# EAGLE board xbee adapter (EAGLE 6.2)
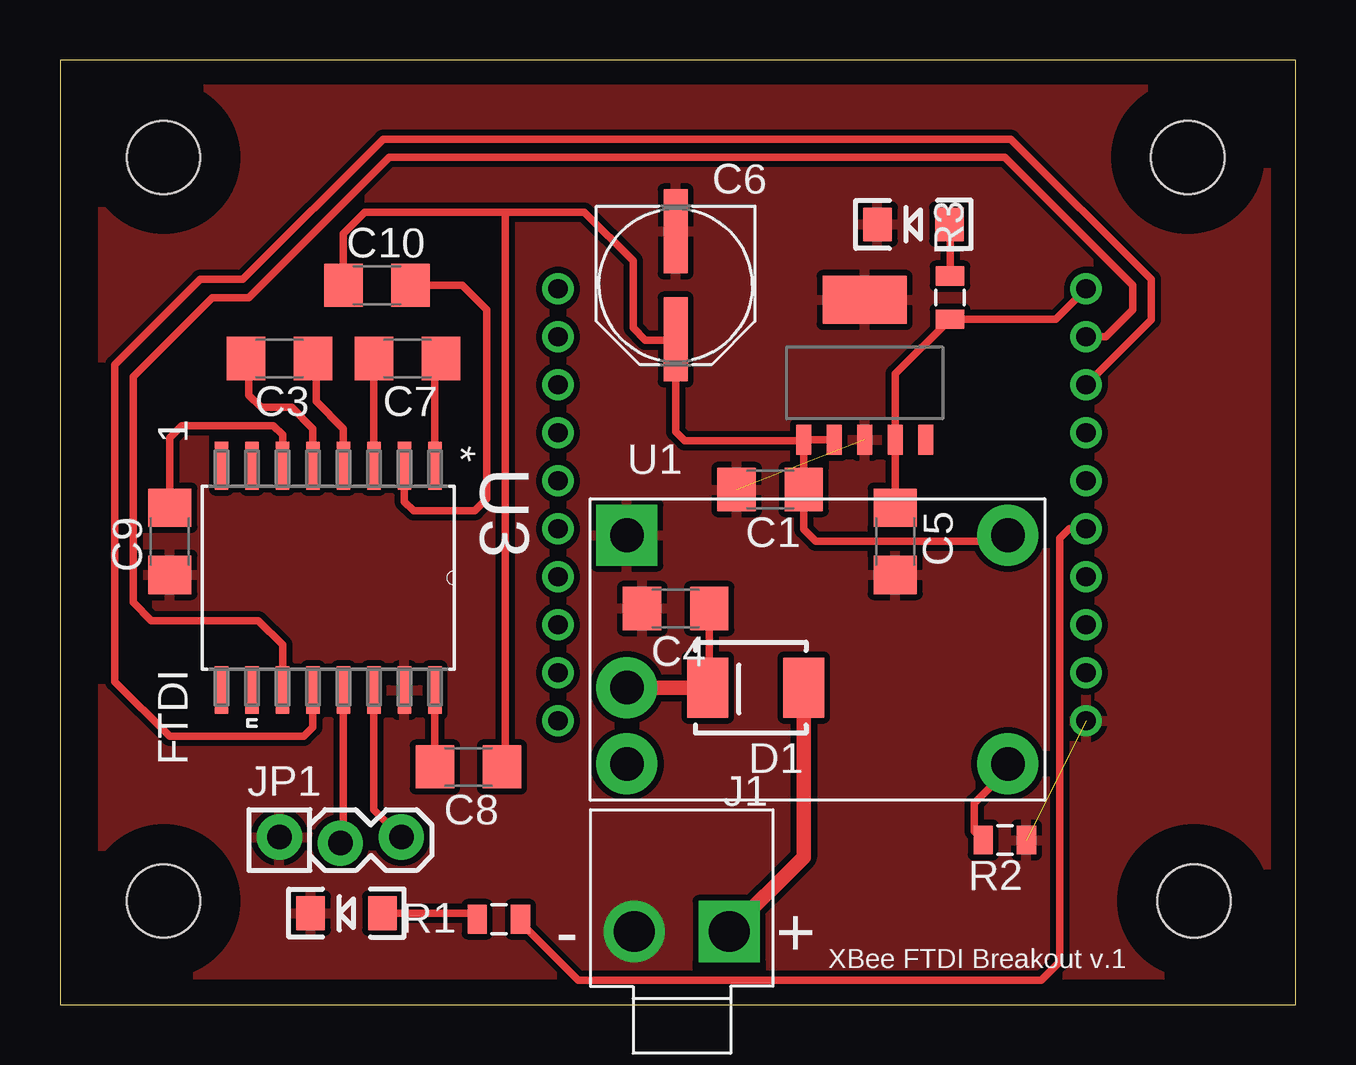
[diagram p0: board, top side]
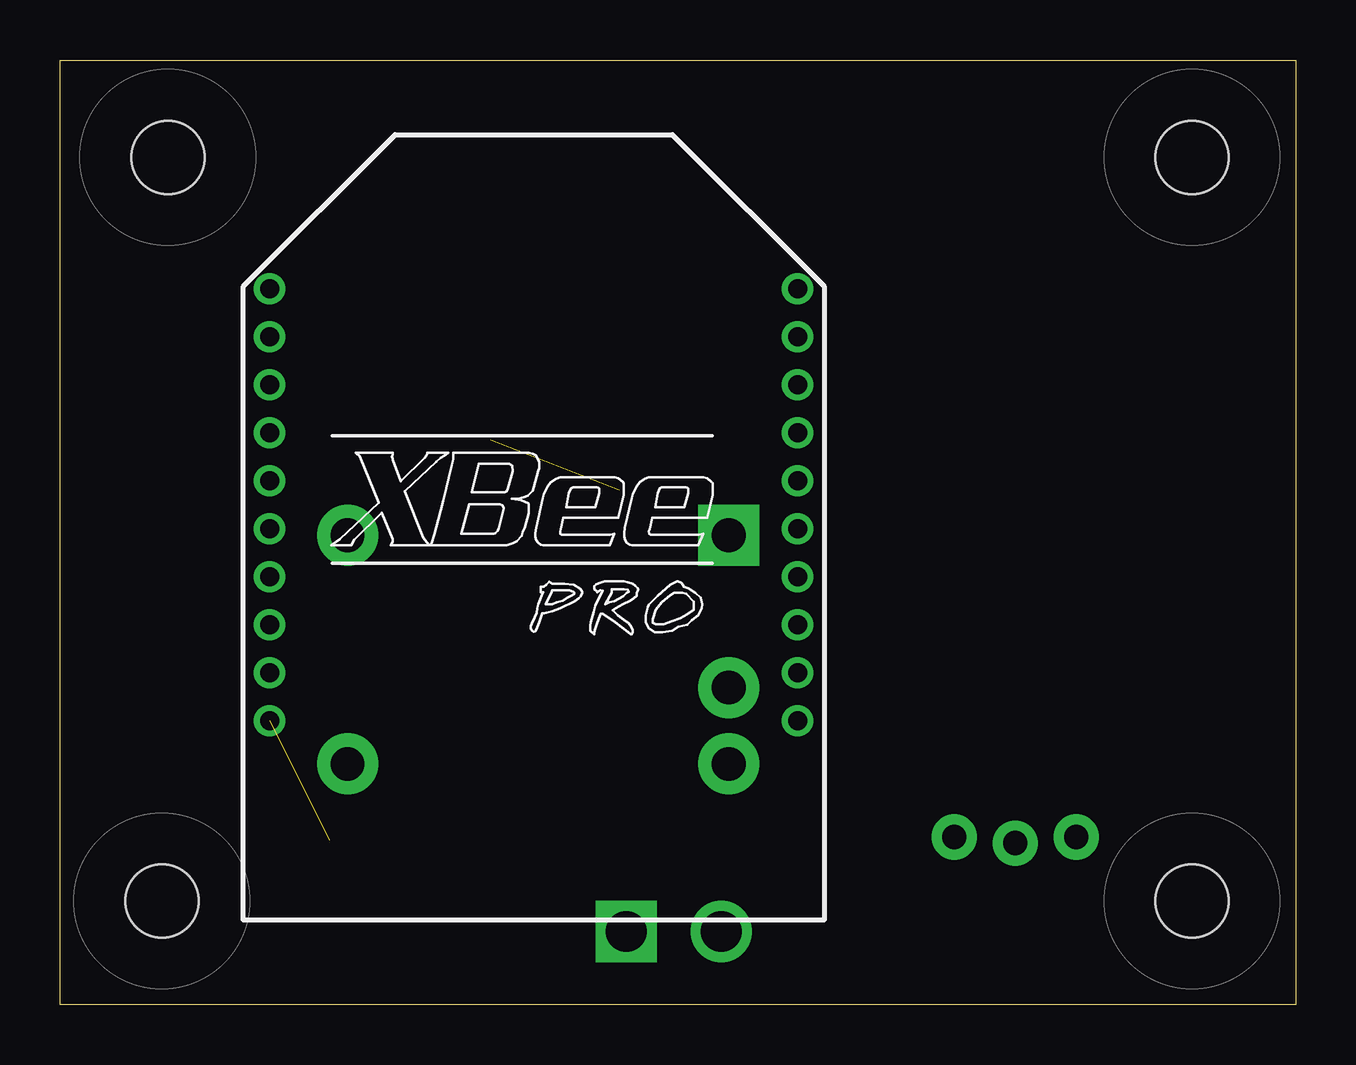
[diagram p1: board, bottom side, seen from below]

Size 51.49 x 39.36 mm. Coordinates in mm from the lower left corner, seen from the top.
Outline: 0,0 51.49,0 51.49,39.36 0,39.36 0,0
Copper layers (1*16): Top 0.035mm / dielectric 1.5mm / Bottom 0.035mm
Design rules: minimum track width 10mil, minimum drill 24mil, track to track 10mil, track to pad 8mil, pad to pad 8mil, via to via 8mil, smd to smd 8mil, copper to edge 40mil, drill to drill 8mil, minimum pad ring 10mil, minimum via ring 8mil, stop-mask expansion 4mil, vias tented up to drill 0mil, thermal gap 10mil
Net classes: 0 default: width 0.406 mm, clearance 0.254 mm; 1 power: width 1.27 mm, clearance 0.508 mm to class 0

## Footprints (pad centres in the part's own frame; a part is rotated, then mirrored left to right if it is on the bottom)
1206 = smd 1.6 x 1.8: 1 -1.4,0; 2 1.4,0
CPOL_6.6 = smd 1 x 3.5: + 0,2.25; - 0,-2.25
SMA-DIODE-B240A = smd 1.7 x 2.5: A 0,0; C 4,0
STAND-OFF-TIGHT = hole 3.048: 0,0
SOCKET-MALE-3.96MM-2 = drill 1.7 square: P$1 -1.98,0 | drill 1.7: P$2 1.98,0
1X03_LOCK = drill 1.016 pad 1.88: 1 0,0.127; 2 2.54,-0.127; 3 5.08,0.127
LED-1206 = smd 1.2 x 1.4: A -1.5,0; C 1.5,0
0805 = smd 0.8 x 1.2: 1 -0.9,0; 2 0.9,0
PTN78000 = drill 1.397 pad 2.54: ADJ 15.875,-9.525; INHIBIT 0,-9.525; V_IN 0,-6.35; V_OUT 15.875,0 | drill 1.397 pad 2.54 square: GND 0,0
SOIC127P1030X265-16N = smd 1.981 x 0.559: 1 -4.674,4.445; 2 -4.674,3.175; 3 -4.674,1.905; 4 -4.674,0.635; 5 -4.674,-0.635; 6 -4.674,-1.905; 7 -4.674,-3.175; 8 -4.674,-4.445; 9 4.674,-4.445; 10 4.674,-3.175; 11 4.674,-1.905; 12 4.674,-0.635; 13 4.674,0.635; 14 4.674,1.905; 15 4.674,3.175; 16 4.674,4.445
SOT223-5 = smd 0.635 x 1.27: P$1 -2.54,-2.625; P$2 -1.27,-2.625; P$3 0,-2.625; P$4 1.27,-2.625; P$5 2.54,-2.625 | smd 3.5 x 2: P$6 0,3.2
XBEE-PRO = drill 0.8 pad 1.27: 1 -11,9; 2 -11,7; 3 -11,5; 4 -11,3; 5 -11,1; 6 -11,-1; 7 -11,-3; 8 -11,-5; 9 -11,-7; 10 -11,-9; 11 11,-9; 12 11,-7; 13 11,-5; 14 11,-3; 15 11,-1; 16 11,1; 17 11,3; 18 11,5; 19 11,7; 20 11,9

## Placement (x,y rotation side)
C1  4.7 uF  [1206]  29.59,21.46 180 top
C3  [1206]  9.14,26.92 180 top
C4  2.2uF  [1206]  25.65,16.51 180 top
C5  1 uF  [1206]  34.8,19.3 270 top
C6  100uF  [CPOL_6.6]  25.65,29.97 180 top
C7  [1206]  14.48,26.92 180 top
C8  [1206]  17.02,9.91 180 top
C9  [1206]  4.57,19.3 90 top
C10  [1206]  13.21,29.97 0 top
D1  DIODE-SCHOTTKY240A  [SMA-DIODE-B240A]  30.99,13.21 180 top
E$1  [STAND-OFF-TIGHT]  4.32,35.31 0 top
E$2  [STAND-OFF-TIGHT]  4.32,4.32 0 top
E$3  [STAND-OFF-TIGHT]  47.24,4.32 0 top
E$4  [STAND-OFF-TIGHT]  46.99,35.31 0 top
J1  POW_CONNECTMALE  [SOCKET-MALE-3.96MM-2]  25.91,3.05 180 top
JP1  M03LOCK  [1X03_LOCK]  9.14,6.86 0 top
LED1  ACT  [LED-1206]  11.94,3.81 180 top
LED2  PWR  [LED-1206]  35.56,32.51 180 top
R1  330  [0805]  18.29,3.56 180 top
R2  21k  [0805]  39.37,6.86 180 top
R3  330  [0805]  37.08,29.46 270 top
U1  PTN78000  [PTN78000]  23.62,19.56 0 top
U3  MAX232DW  [SOIC127P1030X265-16N]  11.18,17.78 270 top
U$2  MCP1826  [SOT223-5]  33.53,26.16 0 top
XB1  XBEE-PRO  [XBEE-PRO]  31.75,20.83 0 bottom

## Library data of the parts
C1 C3 C5 C7-C10 E$1-E$4 JP1 LED1 LED2 R1 R3 U1 U$2 = ASL
C4 C6 D1 J1 R2 = CMPE118lib
U3 = Texas Instruments_By_element14_Batch_1; MPN: MAX232DW; OC_FARNELL: 9589783; OC_NEWARK: 34K7924; PACKAGE: SOIC-16; SUPPLIER: Texas Instruments
XB1 = xbee; MPN: XBP24-AWI-001; OC_FARNELL: 1337916; OC_NEWARK: 42M2667

## Nets
CTS: XB1.12
DTR: XB1.9
GND: C1.2 C4.2 C5.2 C6.- C9.1 J1.P$2 JP1.1 LED1.C LED2.C R2.1 U1.GND U3.15 U$2.P$3 U$2.P$6 XB1.10
N$1: C3.2 U3.5
N$2: R1.1 XB1.6
N$4: LED1.A R1.2
N$5: LED2.A R3.1
N$6 [power]: R2.2 U1.ADJ
N$7: C7.2 U3.3
N$8 [power]: C4.1 D1.C U1.V_IN
N$9 [power]: D1.A J1.P$1
N$10: C8.2 U3.16
N$11: C9.2 U3.6
N$12: C10.2 U3.2
N$15: C3.1 U3.4
N$16: C7.1 U3.1
RS232RX: JP1.2 U3.13
RS232TX: JP1.3 U3.14
RTS: XB1.16
RX: U3.12 XB1.3
TX: U3.11 XB1.2
VCC: C1.1 C6.+ C8.1 C10.1 U1.V_OUT U$2.P$1 U$2.P$2
VCC3V3: C5.1 R3.2 U$2.P$4 XB1.1

## Tracks (layer width: path | path; a pad name or v marks a point on that pad's centre or on a via)
GND  (2 unrouted)
  pour Top: 1.78,1.27 50.04,1.27 50.29,1.52 50.29,38.35 1.78,38.35
N$1
  Top 0.305: U3.5 10.54,24 9.65,24.89 8.38,24.89 7.87,25.4 7.87,26.79 C3.2
N$2
  Top 0.305: R1.1 19.19,3.42 21.59,1.02 40.89,1.02 41.66,1.78 41.66,19.43 42.05,19.83 XB1.6
N$4
  Top 0.305: LED1.A 17.13,3.81 R1.2
N$5
  Top 0.305: R3.1 37.08,32.49 LED2.A
N$6
  Top 0.305: U1.ADJ 39.5,9.78 38.1,8.38 38.1,7.23 R2.2
N$7
  Top 0.305: U3.3 C7.2
N$8
  Top 0.305: C4.1 27.05,13.27 D1.C
  Top 0.61: U1.V_IN D1.C
N$9
  Top 0.61: D1.A 30.99,6.15 J1.P$1
N$10
  Top 0.305: U3.16 C8.2
N$11
  Top 0.305: U3.6 9.27,23.75 8.89,24.13 5.08,24.13 4.57,23.62 C9.2
N$12
  Top 0.305: U3.2 14.35,20.95 14.73,20.57 17.27,20.57 17.78,21.08 17.78,28.96 16.76,29.97 C10.2
N$15
  Top 0.305: U3.4 11.81,24 10.67,25.15 10.67,26.8 C3.1
N$16
  Top 0.305: U3.1 15.62,26.67 C7.1
RS232RX
  Top 0.305: U3.13 11.81,6.86 JP1.2
RS232TX
  Top 0.305: U3.14 13.08,8.13 JP1.3
RX
  Top 0.305: U3.12 10.54,11.56 10.16,11.18 4.57,11.18 2.29,13.46 2.29,26.67 5.84,30.23 7.62,30.23 13.46,36.07 39.62,36.07 45.47,30.23 45.47,28.54 XB1.3
TX
  Top 0.305: XB1.2 43.58,27.83 44.7,28.96 44.7,29.97 39.37,35.31 13.72,35.31 7.87,29.46 6.35,29.46 3.05,26.16 3.05,16.76 3.81,16 8.25,16 9.27,14.99 U3.11
VCC
  Top 0.305: U1.V_OUT 39.24,19.3 31.5,19.3 30.99,19.81 C1.1 U$2.P$1 | U$2.P$2 U$2.P$1 | U$2.P$1 30.95,23.49 26.04,23.49 25.65,23.88 C6.+ 25.62,27.69 24.38,27.69 23.88,28.19 23.88,30.99 21.84,33.02 18.54,33.02 | C10.1 11.81,32.13 12.7,33.02 18.54,33.02 | 18.54,33.02 18.54,10.03 C8.1
VCC3V3
  Top 0.305: XB1.1 41.49,28.56 R3.2 34.8,26.28 U$2.P$4 C5.1

## Text on the board
tNames: 1 | FTDI | XBee FTDI Breakout v.1